# EAGLE board Adapter Board (EAGLE 7.1.0)
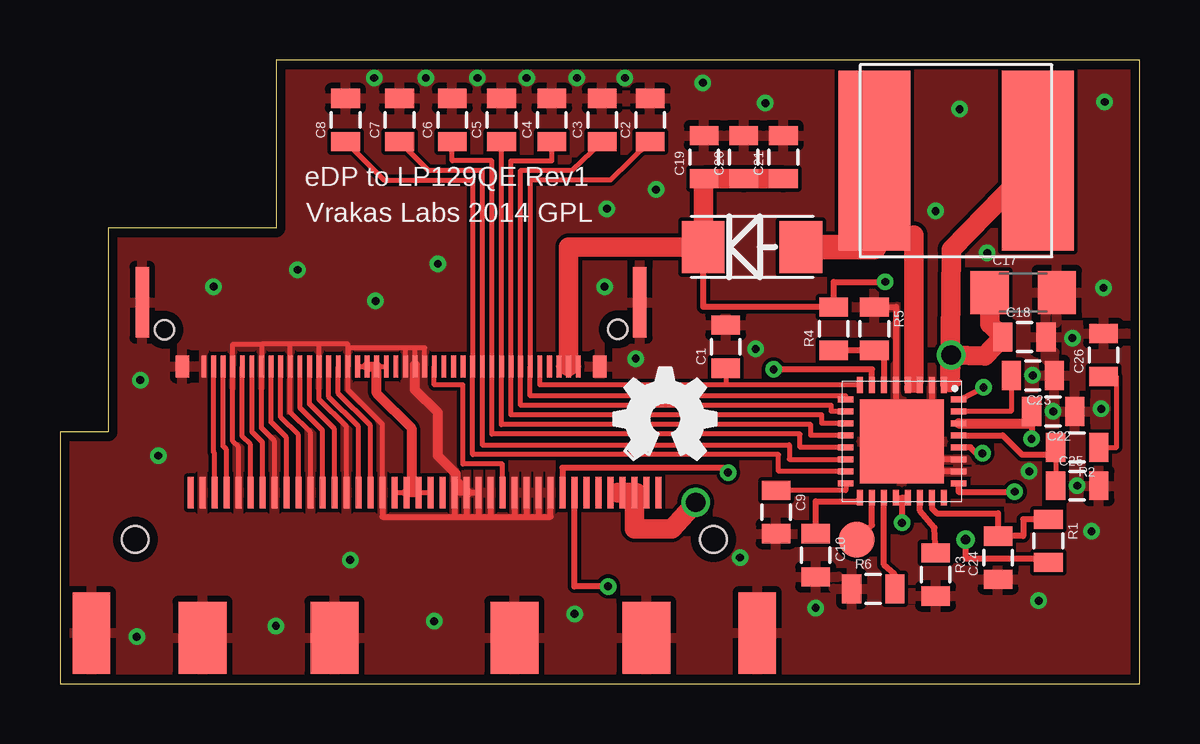
[diagram p0: board, top side]
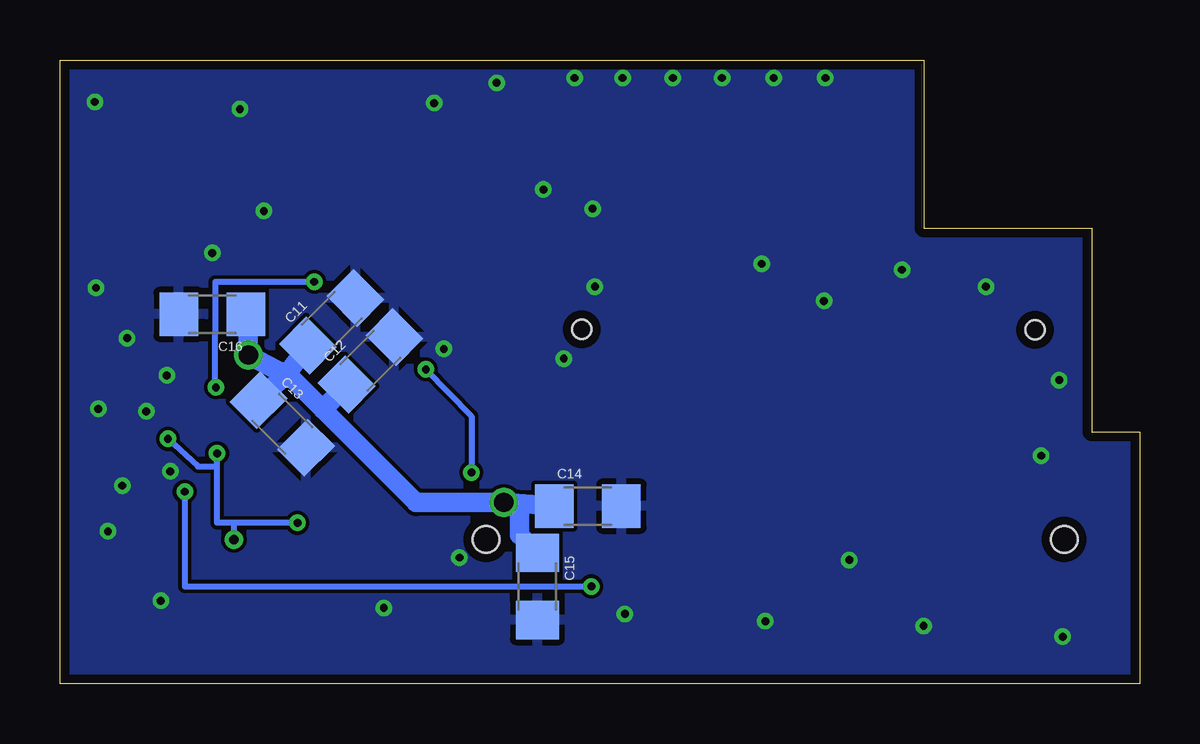
[diagram p1: board, bottom side, seen from below]

Size 45 x 26 mm. Coordinates in mm from the lower left corner, seen from the top.
Outline: 0,0 45,0 45,26 9,26 9,19 2,19 2,10.5 0,10.5 0,0
Copper layers (1*16): Top 0.0356mm / dielectric 1.5011mm / Bottom 0.0356mm
Design rules "oshpark-2layer": minimum track width 6mil, minimum drill 13mil, track to track 6mil, track to pad 6mil, pad to pad 6mil, via to via 6mil, smd to smd 6mil, copper to edge 15mil, drill to drill 6mil, minimum pad ring 7mil, minimum via ring 7mil, stop-mask expansion 4mil, vias tented up to drill 0mil, thermal gap 10mil

## Footprints (pad centres in the part's own frame; a part is rotated, then mirrored left to right if it is on the bottom)
0805 = smd 0.8 x 1.2: 1 -0.9,0; 2 0.9,0
1206 = smd 1.6 x 1.8: 1 -1.4,0; 2 1.4,0
SK38A-DIODE = smd 1.778 x 2.159: A -2.032,0; C 2.032,0
TP15R = smd 1.5 x 1.5: TP 0,0
ACES-50203-040 = smd 0.25 x 1.3: P$1 -9.75,-0.65; P$2 -9.25,-0.65; P$3 -8.75,-0.65; P$4 -8.25,-0.65; P$5 -7.75,-0.65; P$6 -7.25,-0.65; P$7 -6.75,-0.65; P$8 -6.25,-0.65; P$9 -5.75,-0.65; P$10 -5.25,-0.65; P$11 -4.75,-0.65; P$12 -4.25,-0.65; P$13 -3.75,-0.65; P$14 -3.25,-0.65; P$15 -2.75,-0.65; P$16 -2.25,-0.65; P$17 -1.75,-0.65; P$18 -1.25,-0.65; P$19 -0.75,-0.65; P$20 -0.25,-0.65; P$21 0.25,-0.65; P$22 0.75,-0.65; P$23 1.25,-0.65; P$24 1.75,-0.65; P$25 2.25,-0.65; P$26 2.75,-0.65; P$27 3.25,-0.65; P$28 3.75,-0.65; P$29 4.25,-0.65; P$30 4.75,-0.65; P$31 5.25,-0.65; P$32 5.75,-0.65; P$33 6.25,-0.65; P$34 6.75,-0.65; P$35 7.25,-0.65; P$36 7.75,-0.65; P$37 8.25,-0.65; P$38 8.75,-0.65; P$39 9.25,-0.65; P$40 9.75,-0.65 | smd 1.55 x 3.4: P$41 -13.875,-6.5; P$42 13.875,-6.5 | smd 2 x 3: P$43 -9.25,-6.7; P$44 -3.75,-6.7; P$45 3.75,-6.7; P$46 9.25,-6.7 | hole 1.1: 12.05,-2.6; -12.05,-2.6
I-PEX-20474-040E-12 = smd 0.55 x 0.9: AUX1 0.8,0; AUX2 -16.6,0 | smd 0.56 x 2.95: GND-PAD1 -18.27,-2.675; GND-PAD2 2.47,-2.675 | smd 0.2 x 0.9: P$1 -0.1,0; P$2 -0.5,0; P$3 -0.9,0; P$4 -1.3,0; P$5 -1.7,0; P$6 -2.1,0; P$7 -2.5,0; P$8 -2.9,0; P$9 -3.3,0; P$10 -3.7,0; P$11 -4.1,0; P$12 -4.5,0; P$13 -4.9,0; P$14 -5.3,0; P$15 -5.7,0; P$16 -6.1,0; P$17 -6.5,0; P$18 -6.9,0; P$19 -7.3,0; P$20 -7.7,0; P$21 -8.1,0; P$22 -8.5,0; P$23 -8.9,0; P$24 -9.3,0; P$25 -9.7,0; P$26 -10.1,0; P$27 -10.5,0; P$28 -10.9,0; P$29 -11.3,0; P$30 -11.7,0; P$31 -12.1,0; P$32 -12.5,0; P$33 -12.9,0; P$34 -13.3,0; P$35 -13.7,0; P$36 -14.1,0; P$37 -14.5,0; P$38 -14.9,0; P$39 -15.3,0; P$40 -15.7,0 | hole 0.8: 1.55,-1.53; -17.35,-1.55
QFN32 = smd 0.65 x 0.25: 1 -2.35,1.75; 2 -2.35,1.25; 3 -2.35,0.75; 4 -2.35,0.25; 5 -2.35,-0.25; 6 -2.35,-0.75; 7 -2.35,-1.25; 8 -2.35,-1.75; 17 2.35,-1.75; 18 2.35,-1.25; 19 2.35,-0.75; 20 2.35,-0.25; 21 2.35,0.25; 22 2.35,0.75; 23 2.35,1.25; 24 2.35,1.75 | smd 0.25 x 0.65: 9 -1.75,-2.35; 10 -1.25,-2.35; 11 -0.75,-2.35; 12 -0.25,-2.35; 13 0.25,-2.35; 14 0.75,-2.35; 15 1.25,-2.35; 16 1.75,-2.35; 25 1.75,2.35; 26 1.25,2.35; 27 0.75,2.35; 28 0.25,2.35; 29 -0.25,2.35; 30 -0.75,2.35; 31 -1.25,2.35; 32 -1.75,2.35 | smd 3.5 x 3.5: GND 0,0
INDUCTOR = smd 3 x 7.5: P$1 3.4,0; P$2 -3.4,0

## Placement (x,y rotation side)
C1  220pF  [0805]  27.75,14.05 90 top
C2  220pF  [0805]  24.6,23.5 90 top
C3  220pF  [0805]  22.6,23.5 90 top
C4  220pF  [0805]  20.5,23.5 90 top
C5  220pF  [0805]  18.4,23.5 90 top
C6  220pF  [0805]  16.35,23.5 90 top
C7  220pF  [0805]  14.15,23.5 90 top
C8  220pF  [0805]  11.9,23.5 90 top
C9  220pF  [0805]  29.85,7.15 270 top
C10  220pF  [0805]  31.5,5.35 270 top
C11  10uF  [1206]  33.67,15.09 45 bottom
C12  10uF  [1206]  32.06,13.46 45 bottom
C13  10uF  [1206]  35.73,10.83 315 bottom
C14  10uF  [1206]  23,7.4 0 bottom
C15  10uF  [1206]  25.1,4.05 270 bottom
C16  10uF  [1206]  38.65,15.4 180 bottom
C17  10uF  [1206]  40.15,16.3 0 top
C18  0.1uF  [0805]  40.2,14.45 0 top
C19  4.7uF  [0805]  26.85,21.95 90 top
C20  4.7uF  [0805]  28.5,21.95 90 top
C21  4.7uF  [0805]  30.15,21.95 90 top
C22  2.2uF  [0805]  41.4,11.35 180 top
C23  2.2uF  [0805]  40.55,12.85 180 top
C24  2.2uF  [0805]  39.1,5.25 90 top
C25  100pF  [0805]  42.4,8.25 0 top
C26  2700pF  [0805]  43.5,13.7 90 top
DIOD-S  SK38A-DIODE  [SK38A-DIODE]  28.85,18.2 180 top
R1  1K  [0805]  41.2,5.95 270 top
R2  5.6K  [0805]  42.4,9.85 180 top
R3  66.5K  [0805]  36.5,4.55 270 top
R4  150K  [0805]  32.25,14.8 90 top
R5  20K  [0805]  33.95,14.8 270 top
R6  15K  [0805]  33.9,3.95 0 top
TP1  TPTP15R  [TP15R]  33.2,6 0 top
U$1  EDP-40PIN-ACES  [ACES-50203-040]  15.19,8.61 0 top
U$2  LP129QE-EDP-40  [I-PEX-20474-040E-12]  5.9,13.22 180 top
U$3  MC34844-LED-DRIVER  [QFN32]  35.1,10.1 270 top
U$4  ASPI-8040S-INCUCTOR  [INDUCTOR]  37.35,21.8 0 top
U$5  [OSHW_FILLX150_NOTEXT]  23.1,9.35 0 top

## Library data of the parts
C1-C10 = SparkFun-Passives
C11-C17 = SparkFun-Capacitors; PROD_ID: CAP-10057
C18-C26 = SparkFun-Capacitors
DIOD-S U$1-U$4 = LCD Connectors
R1-R6 = SparkFun-Resistors
TP1 = testpad
U$5 = ohw-logo

## Nets
BKLT-VCC: C11.1 C12.1 C13.1 C14.1 C15.1 C16.1 C17.1 C18.1 U$1.P$36 U$1.P$37 U$1.P$38 U$1.P$39 U$3.1 U$4.P$1
BL0: C1.1 U$2.P$36 U$3.8
BL1: C2.1 U$2.P$35 U$3.9
BL2: C3.1 U$2.P$34 U$3.10
BL3: C4.1 U$2.P$33 U$3.11
BL4: C5.1 U$2.P$32 U$3.12
BL5: C6.1 U$2.P$31 U$3.13
BL6: C7.1 U$2.P$30 U$3.14
BL7: C8.1 U$2.P$29 U$3.15
BL8: C9.1 U$3.16
BL9: C10.1 U$3.17
BL-ANODE: C19.1 C20.1 C21.1 DIOD-S.C R4.2 U$2.P$38 U$2.P$39 U$2.P$40 U$3.32
EN: U$1.P$32 U$3.7
GND: C1.2 C2.2 C3.2 C4.2 C5.2 C6.2 C7.2 C8.2 C9.2 C10.2 C11.2 C12.2 C13.2 C14.2 C15.2 C16.2 C17.2 C18.2 C19.2 C20.2 C21.2 C22.1 C23.1 C24.1 C25.2 C26.2 R3.2 R5.1 R6.1 U$1.P$2 U$1.P$5 U$1.P$8 U$1.P$11 U$1.P$14 U$1.P$17 U$1.P$23 U$1.P$24 U$1.P$25 U$1.P$26 U$1.P$28 U$1.P$29 U$1.P$30 U$1.P$31 U$1.P$41 U$1.P$42 U$1.P$43 U$1.P$44 U$1.P$45 U$1.P$46 U$2.AUX1 U$2.AUX2 U$2.GND-PAD1 U$2.GND-PAD2 U$2.P$1 U$2.P$4 U$2.P$7 U$2.P$10 U$2.P$13 U$2.P$16 U$2.P$22 U$2.P$23 U$2.P$24 U$3.2 U$3.5 U$3.26 U$3.27 U$3.GND
HPD: U$1.P$27 U$2.P$25
N$1: C25.1 R2.2 U$3.29
N$2: U$1.P$3 U$2.P$2
N$3: U$1.P$4 U$2.P$3
N$4: C23.2 U$3.31
N$5: U$1.P$6 U$2.P$5
N$6: U$1.P$7 U$2.P$6
N$8: U$1.P$9 U$2.P$8
N$9: U$1.P$10 U$2.P$9
N$10: C24.2 R1.1 U$3.23
N$11: U$1.P$12 U$2.P$11
N$12: U$1.P$13 U$2.P$12
N$13: C26.1 R2.1
N$14: U$1.P$15 U$2.P$14
N$15: U$1.P$16 U$2.P$15
N$16: R4.1 R5.2 U$3.6
N$17: R3.1 U$3.22
N$18: TP1.TP U$3.18
N$20: R6.2 U$3.19
PNL-VCC: U$1.P$18 U$1.P$19 U$1.P$20 U$1.P$21 U$2.P$17 U$2.P$18 U$2.P$19 U$2.P$20
PWM: U$1.P$33 U$3.25
SWA/B: DIOD-S.A U$3.3 U$3.4 U$4.P$2
VDC1: C22.2 R1.2 U$3.20 U$3.21 U$3.28 U$3.30

## Tracks (layer width: path | path; a pad name or v marks a point on that pad's centre or on a via)
BKLT-VCC  (via drill 0.8)
  Top 0.2: U$1.P$36 U$1.P$37 U$1.P$38 U$1.P$39
  Top 0.305: 37.45,12.55 37.27,12.72 37.1,12.55 36.9,12.35 U$3.1
  Top 0.813: U$4.P$1 37.15,18.1 37.1,12.55 v37.15,13.7 38.55,13.65 C18.1 38.75,15 C17.1 | 23.95,7.8 24.05,7.9 24.1,7.9 24.05,7.95 23.25,7.95 23.26,7.96 U$1.P$38 23.94,6.45 25.5,6.45 v26.5,7.55
  Bottom 0.813: v26.5,7.55 25.85,7.35 25.85,6.2 C15.1 | v26.5,7.55 30.15,7.55 34.02,11.43 | 34.02,11.43 35.52,12.93 | 35.52,12.93 35.58,12.88 | 35.58,12.88 v37.15,13.7 37.15,15.4 C16.1 | C12.1 34.02,11.43 | C11.1 35.58,12.88 | C13.1 35.52,12.93 | C14.1 v26.5,7.55
BL0
  Top 0.2: U$3.8 27.75,12.45 | 27.75,12.45 20,12.45 U$2.P$36 | C1.1 27.75,12.45
BL1
  Top 0.2: U$3.9 32.75,12 19.6,12 U$2.P$35 19.6,21 22.95,21 C2.1
BL2
  Top 0.2: U$3.10 32.15,11.35 32.15,11.6 19.2,11.6 U$2.P$34 19.2,21.4 21.35,21.4 C3.1
BL3
  Top 0.2: U$3.11 31.75,10.85 31.75,11.2 18.8,11.2 U$2.P$33 18.8,21.8 20.5,21.8 C4.1
BL4
  Top 0.2: U$3.12 31.3,10.35 31.3,10.8 18.4,10.8 U$2.P$32 C5.1
BL5
  Top 0.2: U$3.13 30.85,9.85 30.85,10.4 18,10.4 U$2.P$31 18,21.8 16.35,21.8 C6.1
BL6
  Top 0.2: U$3.14 30.4,9.35 30.4,9.95 17.6,9.95 U$2.P$30 17.6,21.4 15.35,21.4 C7.1
BL7
  Top 0.2: U$3.15 29.95,8.85 29.95,9.55 17.2,9.55 U$2.P$29 17.2,21 13.5,21 C8.1
BL8
  Top 0.2: U$3.16 32.75,8.05 C9.1
BL9
  Top 0.254: C10.1 31.5,7.6 33.2,7.6 arc90 U$3.17
BL-ANODE  (via drill 0.33)
  Top 0.254: U$2.P$38 U$2.P$39 U$2.P$40 | DIOD-S.C 26.82,15.7 R4.2 32.25,16.75 v34.4,16.75 | v38.5,12.35 37.55,11.85 U$3.32
  Top 0.813: U$2.P$39 21.2,18.2 DIOD-S.C 26.82,21.02 C19.1 C20.1 C21.1
  Bottom 0.254: v34.4,16.75 38.52,16.75 38.55,12.35 v38.5,12.35
EN  (via drill 0.33)
  Top 0.254: U$3.7 33.85,13.1 v29.75,13.1 | v27.85,8.8 27.65,9 20.95,9 20.94,8.99 U$1.P$32
  Bottom 0.254: v29.75,13.1 27.85,11.15 v27.85,8.8
GND  (via drill 0.33)
  Top 0.2: U$1.P$17 13.44,10.81 12,12.25 U$2.P$16 | U$2.P$22 14.4,14 | 14.4,14 12,14 U$2.P$16 | U$2.P$23 14.8,13.3 14.8,14 | 14.8,14 14.4,14 | U$2.P$24 15.2,14 14.8,14 | 8.4,14.15 7.2,14.15 U$2.P$4 7.2,10.1 7.44,9.86 U$1.P$5 | 8.4,14.15 U$2.P$7 8.4,10.65 8.94,10.11 U$1.P$8 | 9.6,14.15 U$2.P$10 9.6,11.3 10.44,10.46 U$1.P$11 | 9.6,14.15 8.4,14.15 | 10.8,14.15 U$2.P$13 10.8,11.85 11.94,10.71 U$1.P$14 | 10.8,14.15 9.6,14.15 | U$2.P$16 12,14.15 10.8,14.15
  Top 0.254: U$1.P$24 U$1.P$23 16.44,6.95 | U$1.P$24 U$1.P$25 17.44,6.95 | 16.44,6.95 16.94,6.95 | 16.94,6.95 17.44,6.95 | 17.44,6.95 17.94,6.95 | 17.94,6.95 18.94,6.95 | 18.94,6.95 19.44,6.95 | 19.44,6.95 19.94,6.95 | 19.94,6.95 20.45,6.95 U$1.P$31 | U$1.P$30 19.94,6.95 | U$1.P$29 19.44,6.95 | U$1.P$28 18.94,6.95 | U$1.P$24 16.94,6.95 | U$1.P$26 17.94,6.95 | U$1.P$17 13.44,6.95 16.44,6.95 | U$3.27 35.85,9.35 arc-90 U$3.GND | U$3.GND arc-90 34.85,10.35 U$3.5 34.85,15.7 R5.1 | U$3.2 36.35,10.1 U$3.GND | U$3.26 36.35,8.85 arc-90 U$3.GND
  Top 0.406: 17,7.95 16.5,8.45 16.5,8.75 15.75,9.5 15.75,11.3 14.8,12.25 14.8,13.3
  other vias: 9.9,17.25 15.75,17.5 29,13.95 38.65,17.95 40.4,8.85 42.2,14.4 29.4,24.2 13.15,15.95 26.8,25.05 21.45,2.9 40.8,3.45 43.5,16.5 40.55,12.85 41.4,11.35 43.4,11.45 42.4,8.25 24,13.55 22.7,16.55 24.85,20.6 36.5,19.7 15.6,2.6 3.2,1.95 3.35,12.65 6.4,16.55 22.8,19.8 37.5,23.95 43.55,24.25 43,6.35 28.35,5.25 9,2.4 4.1,9.5 12.1,5.15 31.5,3.15 13.1,25.25 15.25,25.25 19.45,25.25 23.55,25.25 17.4,25.25 21.55,25.25
  pour Top: -2.05,-4.65 -2.05,29.2 53.4,29.2 53.4,-4.65
  pour Bottom: -3.25,29.95 -3.25,-6.3 57.95,-6.3 57.95,29.95
HPD
  Top 0.2: U$1.P$27 18.44,9.15 16.8,9.15 16.8,12.45 15.6,12.45 U$2.P$25
N$1
  Top 0.2: R2.2 C25.1
  Top 0.254: U$3.29 39.3,10.35 40.1,9.55 41.3,9.55 R2.2
N$2
  Top 0.2: U$1.P$3 6.44,9.61 6.4,9.65 U$2.P$2
N$3
  Top 0.2: U$1.P$4 6.94,9.76 6.8,9.9 U$2.P$3
N$4
  Top 0.2: C23.2 39.65,11.35 U$3.31
N$5
  Top 0.2: U$1.P$6 7.94,9.96 7.6,10.3 U$2.P$5
N$6
  Top 0.2: U$1.P$7 8.44,10.06 8,10.5 U$2.P$6
N$8
  Top 0.2: U$1.P$9 9.44,10.26 8.8,10.9 U$2.P$8
N$9
  Top 0.2: U$1.P$10 9.94,10.36 9.2,11.1 U$2.P$9
N$10
  Top 0.254: U$3.23 36.35,7.3 36.55,7.1 39.1,7.1 C24.2 40.15,6.15 40.15,6.85 R1.1
N$11
  Top 0.2: U$1.P$12 10.94,10.56 10,11.5 U$2.P$11
N$12
  Top 0.2: U$1.P$13 11.44,10.61 10.4,11.65 U$2.P$12
N$13
  Top 0.2: R2.1 44.05,9.85 44.05,12.8 C26.1
N$14
  Top 0.2: U$1.P$15 12.44,10.71 11.2,11.95 U$2.P$14
N$15
  Top 0.2: U$1.P$16 12.94,10.76 11.6,12.1 U$2.P$15
N$16
  Top 0.254: R4.1 R5.2 34.35,13.8 U$3.6
N$17
  Top 0.254: R3.1 36.45,6.5 35.85,7.2 U$3.22
N$18
  Top 0.254: TP1.TP 33.85,6.6 U$3.18
N$20
  Top 0.254: R6.2 34.8,4.55 34.35,4.95 U$3.19
PNL-VCC
  Top 0.2: U$1.P$20 U$1.P$19 U$1.P$18 | U$2.P$17 U$2.P$18 | U$2.P$19 U$2.P$20 | 14.9,8 U$1.P$20 | U$1.P$20 U$1.P$21
  Top 0.305: 14.65,8.17 U$1.P$19
  Top 0.406: U$2.P$18 U$2.P$19 13.2,12.1 14.65,10.65 14.65,8.17 | U$1.P$19 14.48,8 14.9,8
PWM  (via drill 0.33)
  Top 0.254: U$3.25 37.45,8 v39.8,8 | v22.85,4.05 21.44,4.05 U$1.P$33
  Bottom 0.254: v39.8,8 39.8,4.05 v22.85,4.05
SWA/B
  Top 0.254: 35.6,12.6 35.33,12.22 | 35.33,12.22 35.35,12.65 U$3.4 | U$3.3 35.85,12.25 35.33,12.22
  Top 0.61: 33.95,18.2 35.6,18.7
  Top 0.813: 35.6,18.7 35.6,12.6
  Top 1.016: DIOD-S.A 33.95,18.2 U$4.P$2
VDC1  (via drill 0.33, 0.4)
  Top 0.254: U$3.20 U$3.21 35.1,7.75 v35.1,6.7 | v38.45,9.6 38.2,9.6 37.95,9.85 U$3.28 | 40.5,10.85 v40.5,10.2 | 41.05,5.2 37.75,5.2 v37.75,6
  Top 0.406: U$3.30 40.5,10.85 C22.2 | R1.2 41.05,5.2
  Bottom 0.254: v35.1,6.7 37.75,6.7 | 37.75,6.7 38.45,6.7 38.45,9.05 | 38.45,9.05 v38.45,9.6 | v40.5,10.2 39.25,9.05 38.45,9.05 | v37.75,6 37.75,6.7

## Text on the board
tPlace: eDP to LP129QE Rev1 | Vrakas Labs 2014 GPL